# Altium PCB Rover_Motor_hat.PcbDoc
Units mil, origin at the board's own origin, x right, y up, seen from the top; angles counter-clockwise.
Board outline 825 x 875 mil, 2 copper layers (Top Layer, Bottom Layer); 3 components, 6 nets, 19 pads, 0 vias.
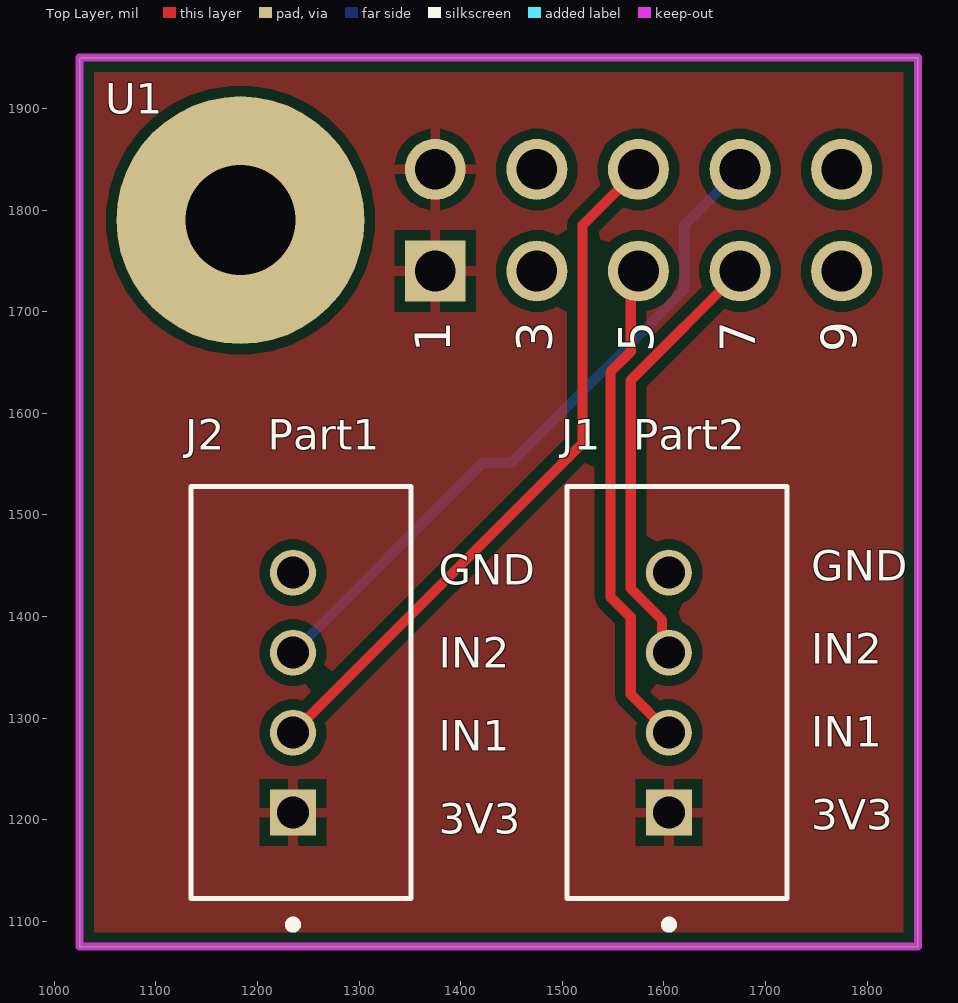
[diagram p0: Top Layer view]
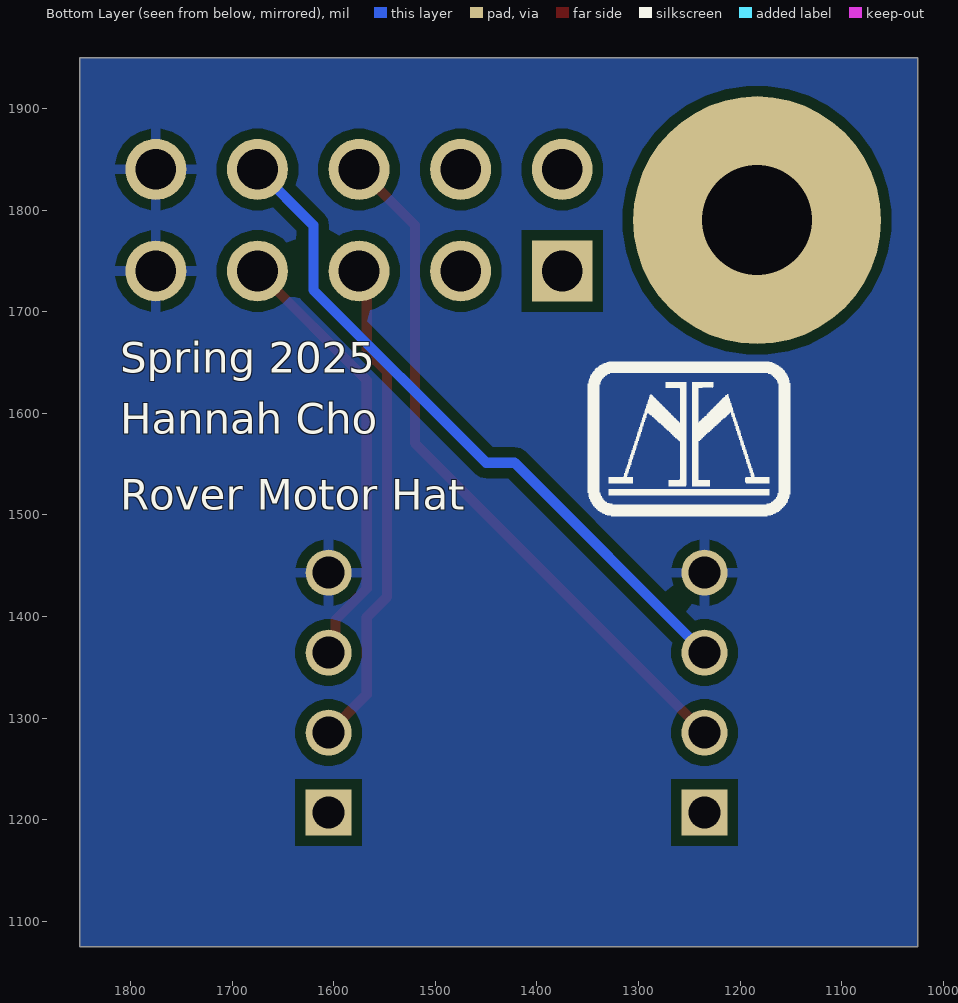
[diagram p1: Bottom Layer view, seen from below]

## Layer stack, top to bottom
Top Solder: solder mask 0.4, Solder Resist, Dk 3.5
Top Layer: signal copper 1.4
Dielectric 1: dielectric 12.6, FR-4, Dk 4.8
Bottom Layer: signal copper 1.4
Bottom Solder: solder mask 0.4, Solder Resist, Dk 3.5

## Board outline
1025,1075 1850,1075 1850,1950 1025,1950

## Design rules (kind name [scope] priority, off if disabled: settings)
Clearance [All] p1: gap=10 ignorepadtopadclearanceinfootprint=FALSE
PolygonConnect [All] p1: connectstyle=Relief reliefconductorwidth=10 reliefentries=4 polygonreliefangle="90 Angle" airgapwidth=10
RoutingVias [All] p1: holewidth=28 width=50 viastyle="Through Hole" minholewidth=28 minwidth=50 maxholewidth=28 maxwidth=50
SolderMaskExpansion [All] p1: expansion=4 istentingtop=FALSE
Width [All] p1: maxlimit=10 minlimit=10 preferedwidth=10
30 further rules are at their usual default settings.

## Components (designator, comment, footprint, x,y, rotation, side; value= is the part's Value field where it differs from the comment)
J1 "MOLEX HEADER 4POS" MOLEX_35362-0450 1605,1325 r90 top
J2 "MOLEX HEADER 4POS" MOLEX_35362-0450 1235,1325 r90 top
U1 "MOTOR_DRIVER_HAT" MOTOR_DRIVER_HAT 1038.7,-349.57 r0 top

## Footprints (in the part's own frame and the unit in brackets; to place one, negate y for a bottom-side part, rotate by r counter-clockwise, add the part's x,y. Pads: shape width x height; smd on the part's side, far side on the other; paste and mask are expansions set on the pad)
MOLEX_35362-0450 [mm]
  rect 1.15x1.15 / inner round 1.15 / far side rect 1.15x1.15 hole 0.8: 01(-3,0)
  round 1.15 hole 0.8: 02(-1,0) 03(1,0) 04(3,0)
  silkscreen extent -5.9,-2.95 5.15,2.55
MOTOR_DRIVER_HAT [mil]
  rect 60x60 / inner round 60 / far side rect 60x60 hole 40: 1(336.3,2089.57)
  round 60 hole 40: 2(336.3,2189.57) 3(436.3,2089.57) 4(436.3,2189.57) 5(536.3,2089.57) 6(536.3,2189.57) 7(636.3,2089.57) 8(636.3,2189.57) 9(736.3,2089.57) 10(736.3,2189.57)
  round 244.09 hole 108.27: S1(144.57,2139.57)

## Part data
J1 J2: library part 35362-0450, "Connector Header Through Hole 4 position 0.079 (2.00mm)", Package=None, Availability="In Stock", Check_prices=https://www.snapeda.com/parts/35362-0450/Molex/view-part/?ref=eda, MF=Molex, MP=35362-0450, Price=None, SnapEDA_Link=https://www.snapeda.com/parts/35362-0450/Molex/view-part/?ref=snap

## Nets (pads, with @x,y where several pads share a name; then routed paths per layer and width w, separated by ;. In a path a pad name is that pad's centre, name@x,y a point inside that pad or via, vN(x,y) a via of type N, cw(c..) or ccw(c..) an arc to the next point about the centre after c; other vN are vias at no path point)
1: J1.01 J2.01 U1.1 U1.2
5: J1.02 U1.5 | length 489.7
  Top Layer w10: U1.5 1567.36,1732.36 1567.36,1660.65 1547.36,1640.65 1547.36,1419.24 1567.36,1399.24 1567.36,1323.27 J1.02
6: J2.02 U1.6 | length 695.2
  Top Layer w10: J2.02 1520,1570.63 1520,1785 U1.6
7: J1.03 U1.7 | length 435.8
  Top Layer w10: J1.03 1598.25,1371.12 1598.25,1396.63 1567.36,1427.52 1567.36,1632.36 U1.7
8: J2.03 U1.8 | length 674.3
  Bottom Layer w10: J2.03 1421.87,1551.24 1449.88,1551.24 1620,1721.36 1620,1785 U1.8
9: J1.04 J2.04 U1.9 U1.10
pads on no net: U1.3 U1.4 U1.S1

## Polygon pours and split planes (outlines as drawn)
9 on Bottom Layer "9_L02_P003" (solid, pour order 3): 1025,1075 1850,1075 1850,1950 1025,1950
1 on Top Layer "1_L01_P002" (solid, pour order 2): 1025,1075 1850,1075 1850,1950 1025,1950

## Keep-outs
Top Layer:
  the board outline again, w7.87

## Silkscreen, mask and mechanical layers (free items; w line width, h text height)
Top Overlay:
  text "1" at 1390,1660 h35 r90
  text "3" at 1490,1660 h35 r90
  text "5" at 1590,1660 h35 r90
  text "7" at 1690,1660 h35 r90
  text "9" at 1790,1660 h35 r90
  text "Part1" at 1210,1564 h30
  text "Part2" at 1570,1564 h30
  text "GND" at 1745,1435 h30
  text "GND" at 1378.25,1431.12 h30
  text "IN2" at 1745,1353.33 h30
  text "IN2" at 1378.25,1349.45 h30
  text "IN1" at 1745,1271.67 h30
  text "IN1" at 1378.25,1267.79 h30
  text "3V3" at 1745,1190 h30
  text "3V3" at 1378.25,1186.12 h30
Bottom Overlay:
  drawing of 4 lines, arcs and shapes, not listed
  text "Spring 2025" at 1810,1640 h30
  text "Hannah Cho" at 1810,1580 h30
  text "Rover Motor Hat" at 1810,1505 h30